# Altium PCB HLK-AX3000-KIT.PcbDoc (part 1 of 3)
Units mm, origin at the board's own origin, x right, y up, seen from the top; angles counter-clockwise.
Board outline 152 x 109 mm, 2 copper layers (Top Layer, Bottom Layer), stack 0.325 mm thick; 227 components, 273 nets, 847 pads, 829 vias.
Unrouted connection lines stored in the file: 195.
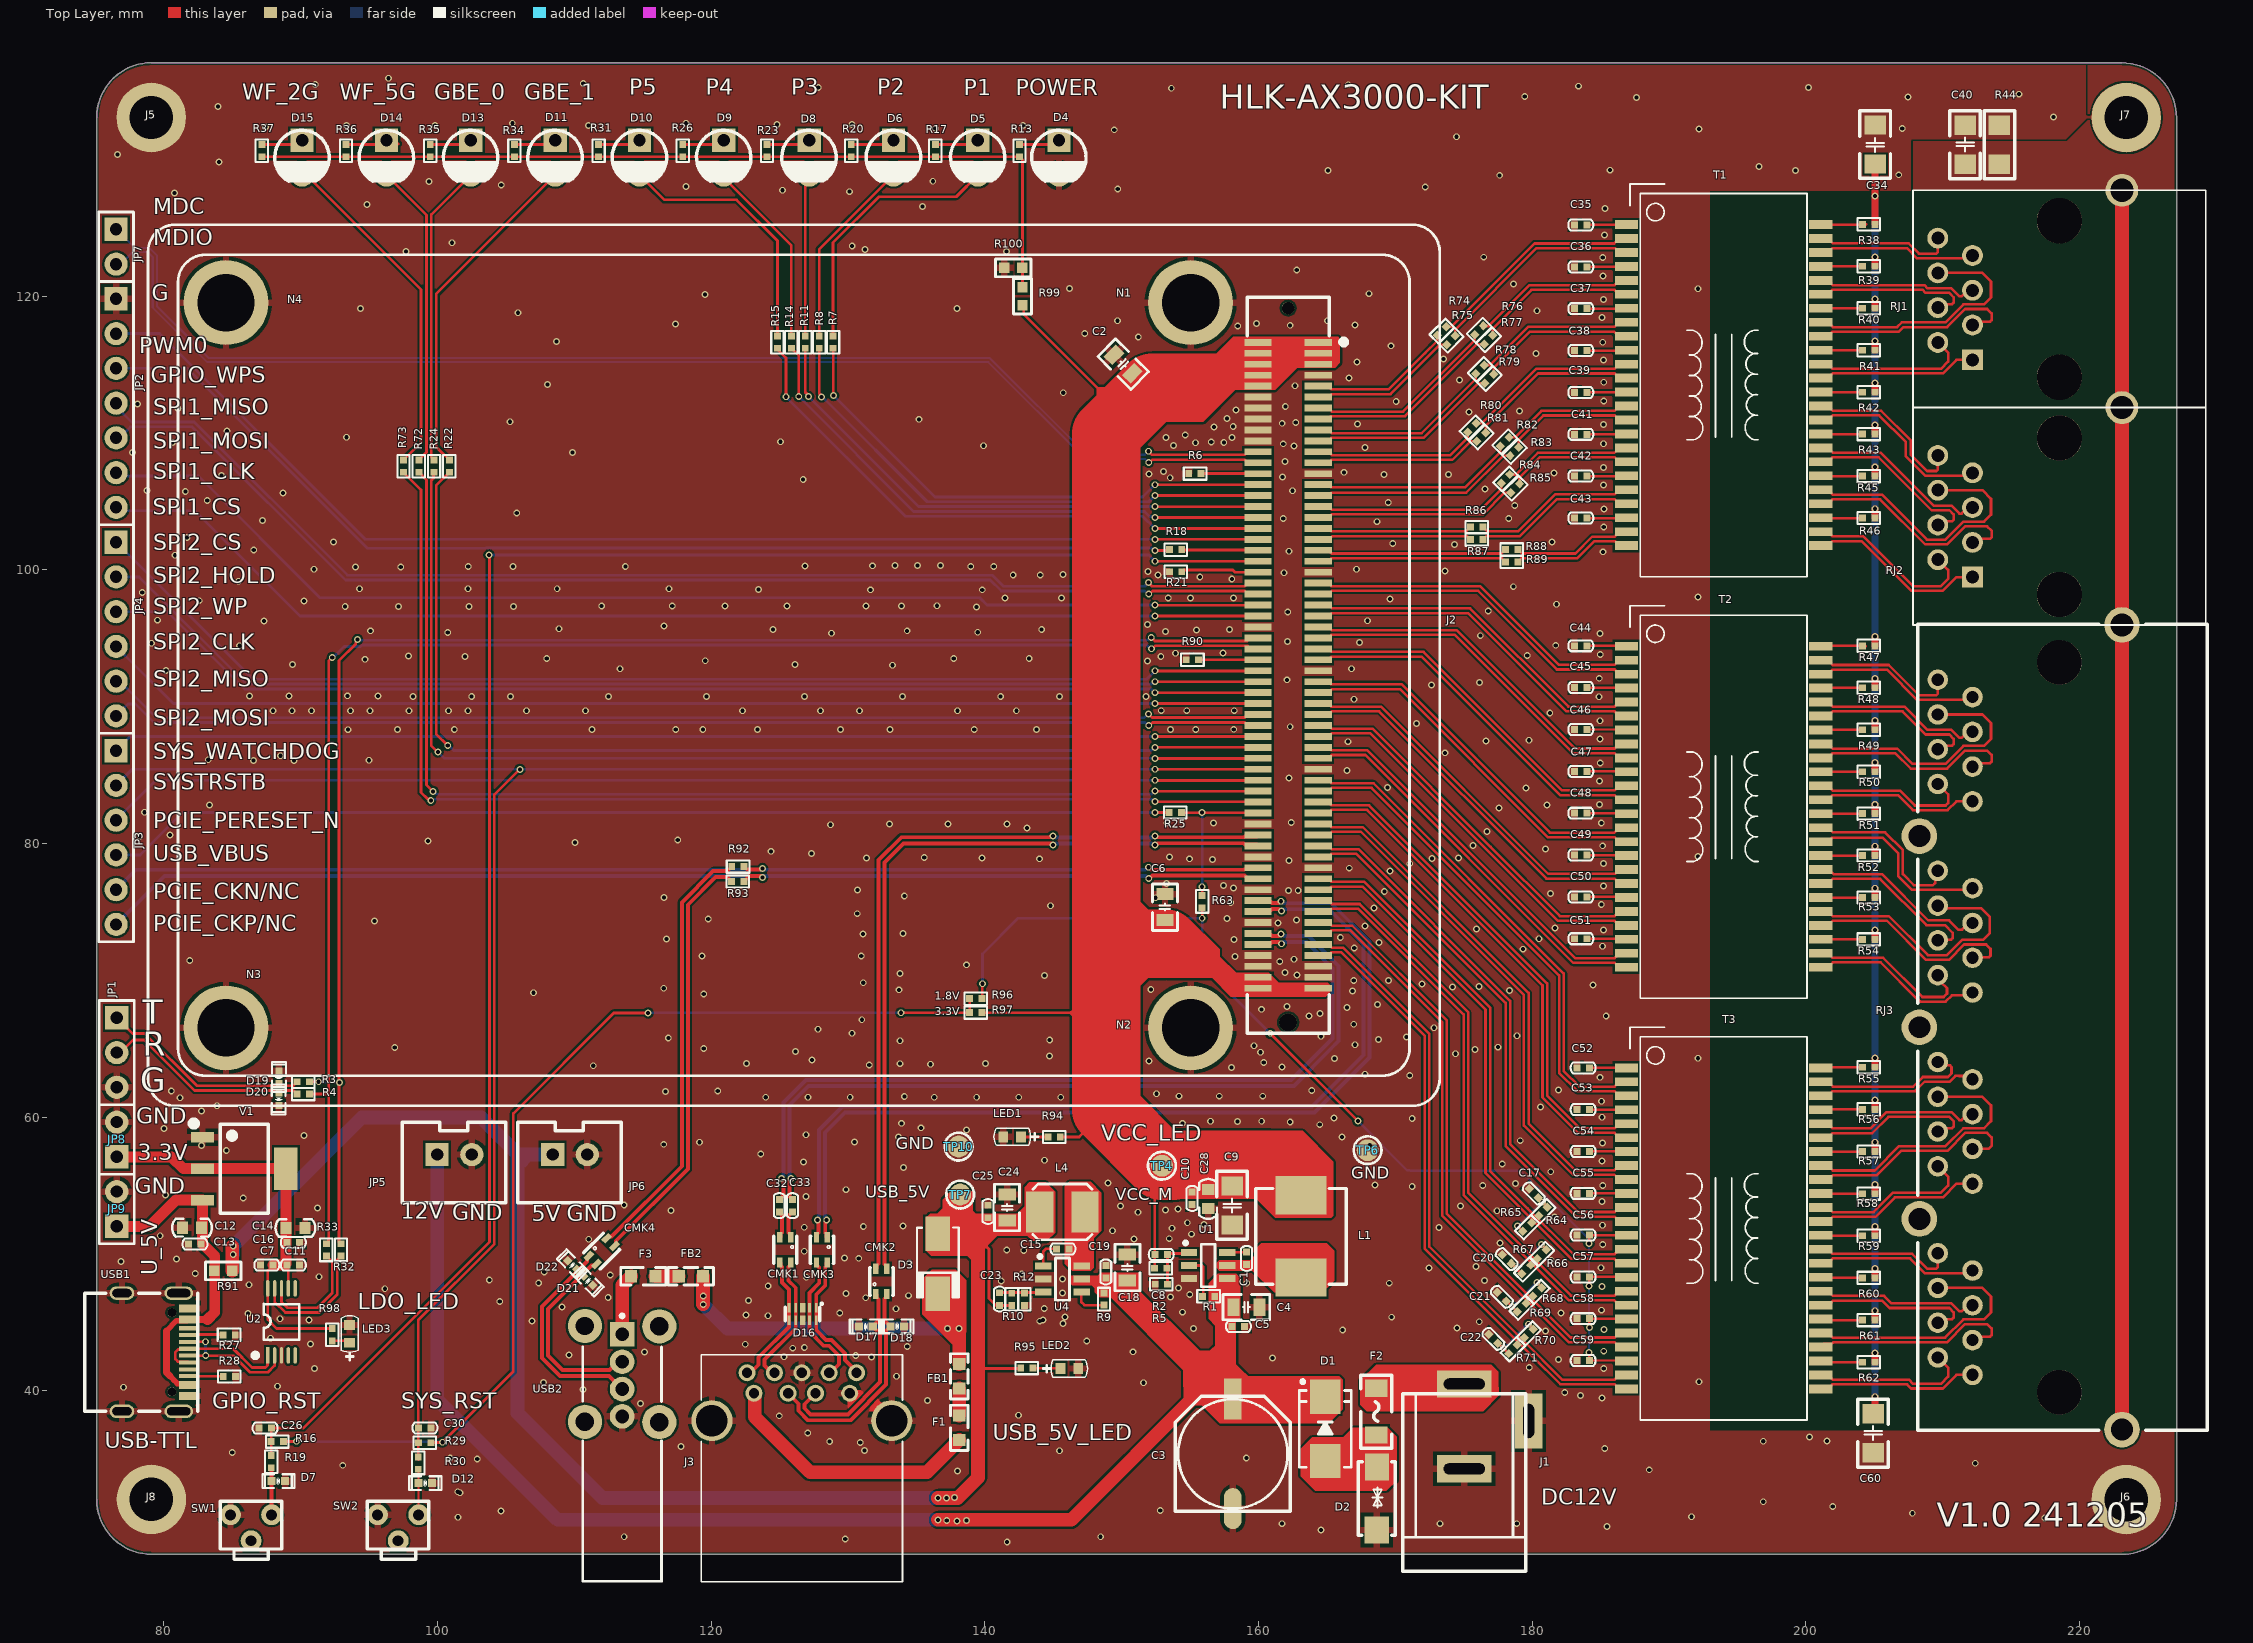
[diagram p0: Top Layer view]
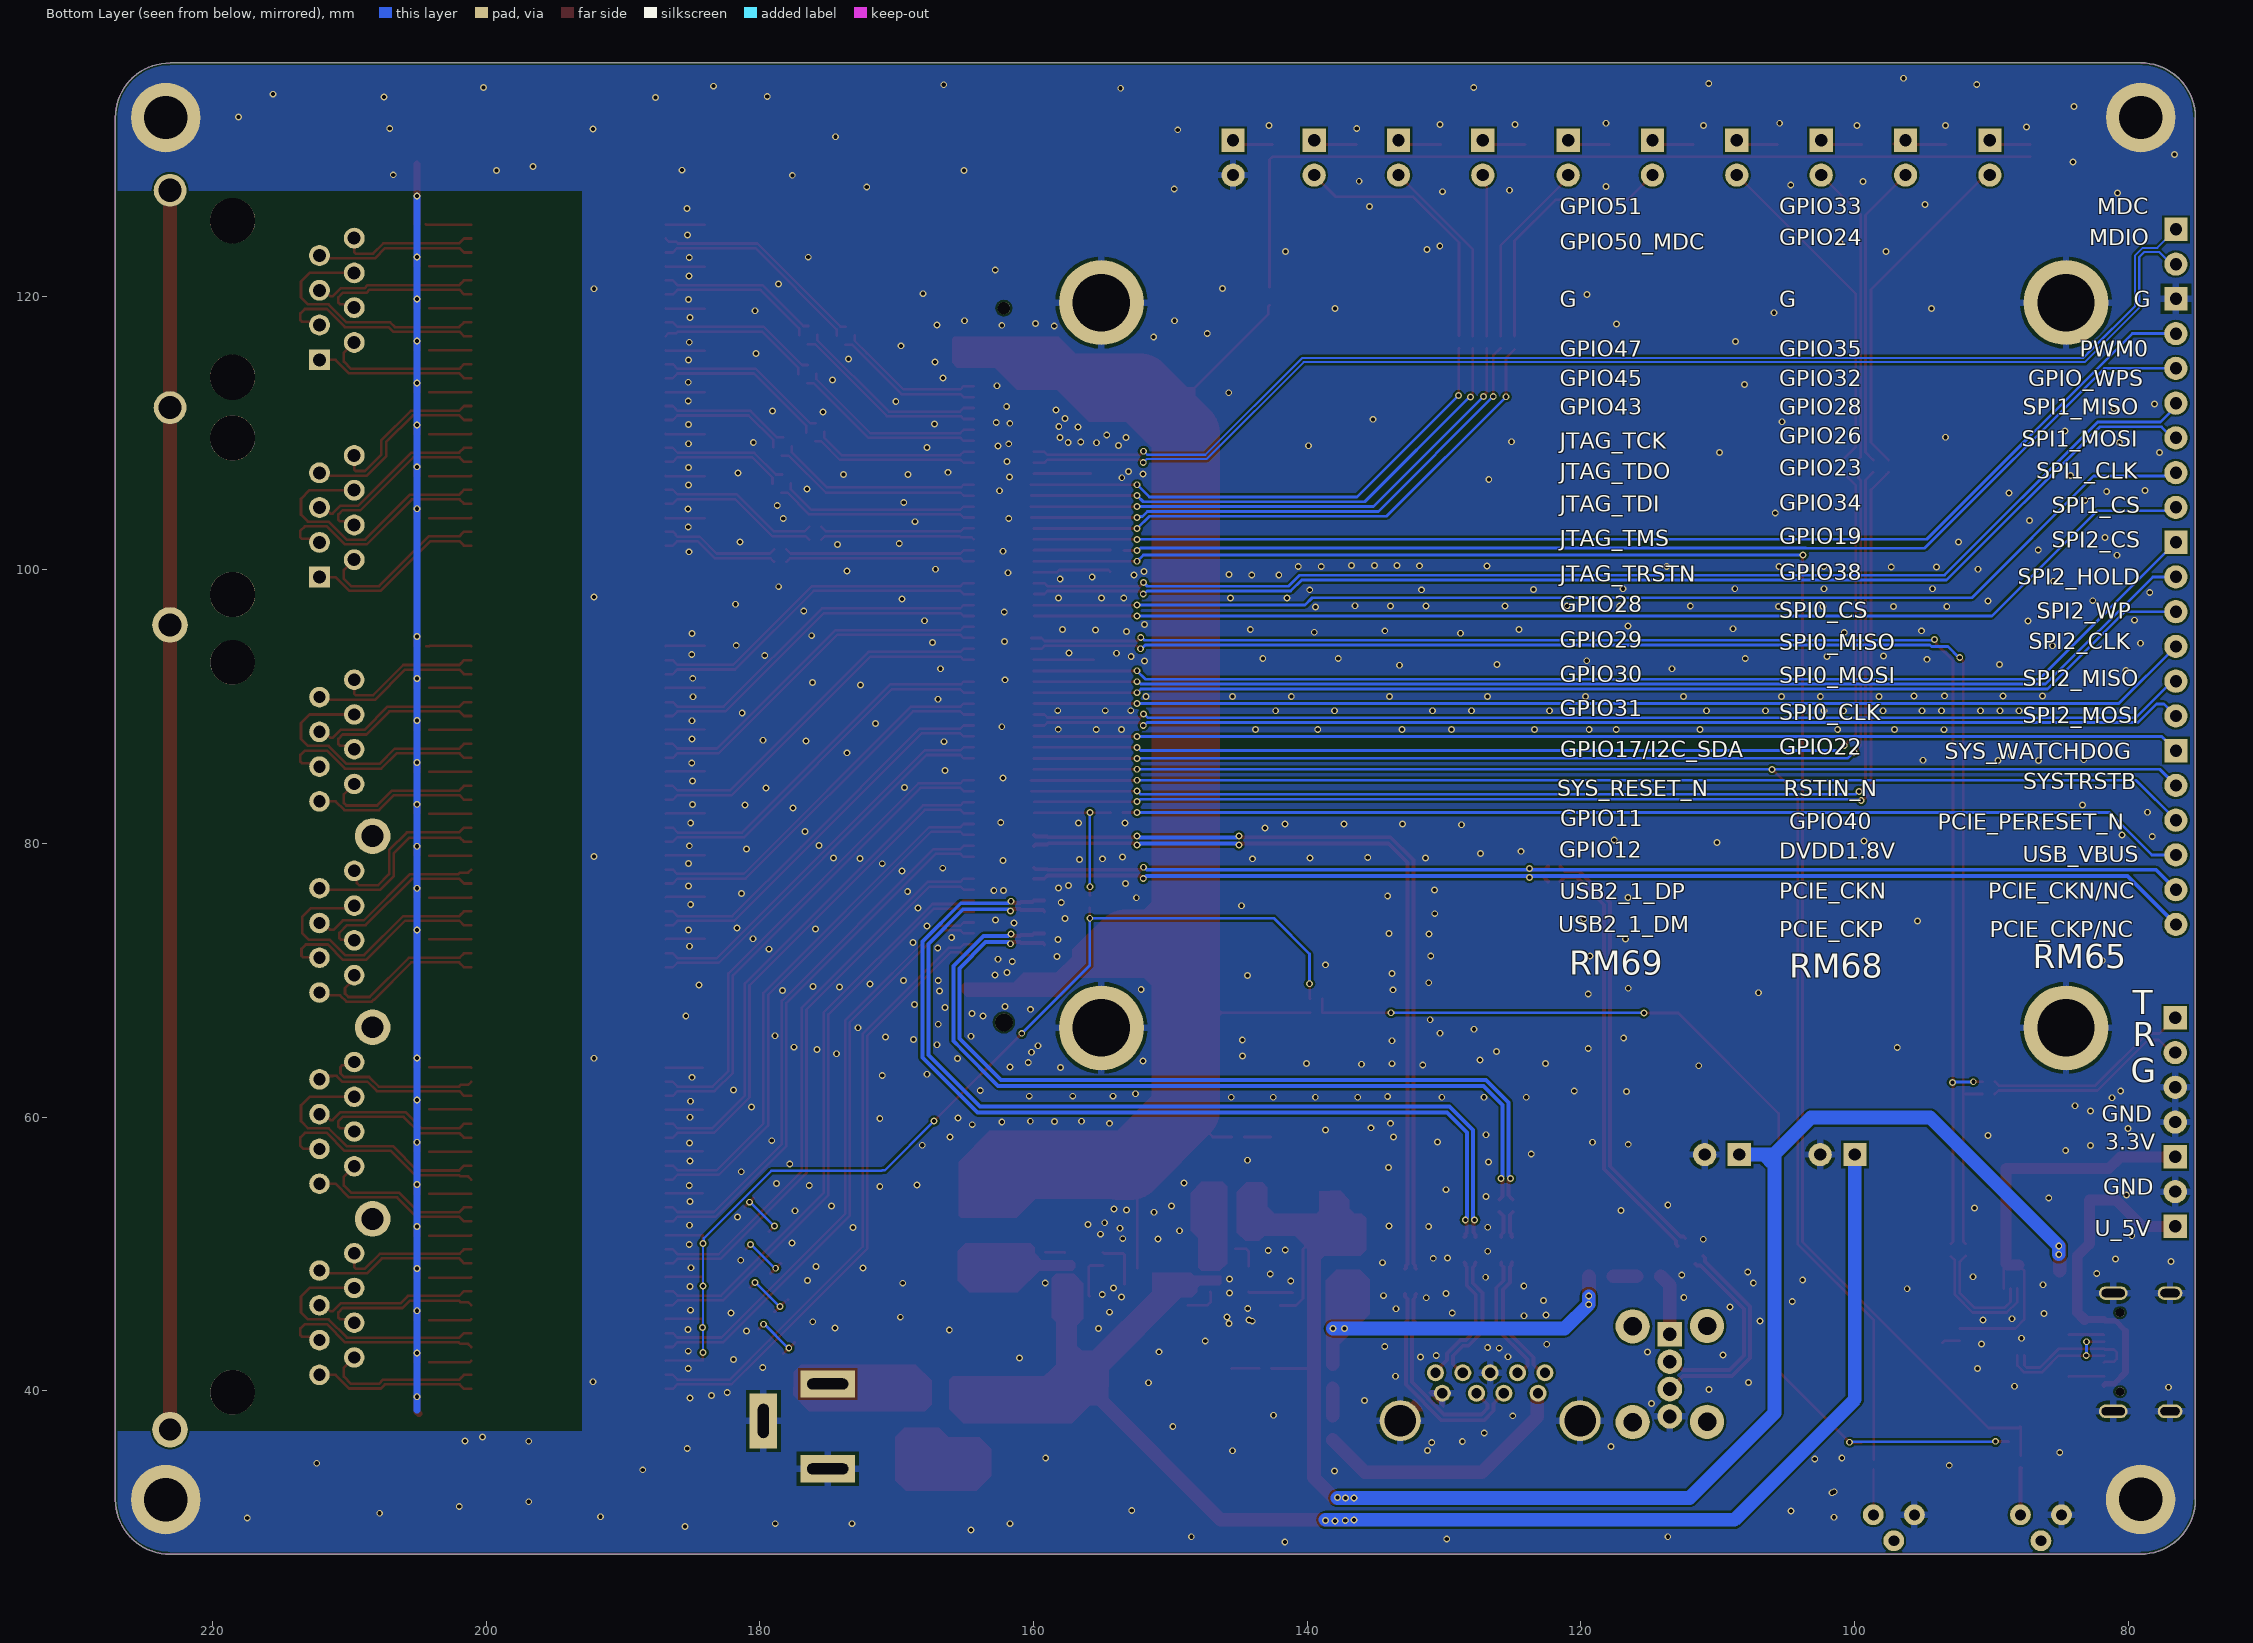
[diagram p1: Bottom Layer view, seen from below]

## Layer stack, top to bottom
Top Solder: solder mask 0.0102, Solder Resist, Dk 3.5
Top Layer: signal copper 0.0356
Dielectric1: core 0.254, FR-4, Dk 4.2
Bottom Layer: signal copper 0.0356
Bottom Solder: solder mask 0.0102, Solder Resist, Dk 3.5

## Board outline
75.089,32.059 75.089,133.053 cw(c79.089,133.053) 79.089,137.053 223.092,137.053 223.092,137.048 cw(c223.092,133.048) 227.092,133.048 227.093,133.047 227.093,32.053 cw(c223.093,32.053) 223.093,28.053 79.095,28.053 79.09,28.058 cw(c79.09,32.058)

## Design rules (kind name [scope] priority, off if disabled: settings)
Clearance Clearance_90ohm [InNetClass('90ohm')] p1: gap=0.152 ignorepadtopadclearanceinfootprint=FALSE
Clearance Clearance_100ohm [InNetClass('100ohm')] p2: gap=0.152 ignorepadtopadclearanceinfootprint=FALSE
Clearance [All] p3: gap=0.152 ignorepadtopadclearanceinfootprint=FALSE
DiffPairsRouting [All] p1: maxlimit=0.152 minlimit=0.152 mostfreqgap=0.152 toplayer_minwidth=0.283 toplayer_maxwidth=0.283 toplayer_prefwidth=0.283 bottomlayer_minwidth=0.283 bottomlayer_maxwidth=0.283 bottomlayer_prefwidth=0.283 maxuncoupledlength=12.7
FabricationTestPointUsage TestPointUsage [All] p1: valid=0 allowmultiple=FALSE
FabricationTestpoint Testpoint [All] p1: side=3 testpointundercomponent=TRUE minsize=1.016 maxsize=2.54 preferedsize=1.524 minholesize=0 maxholesize=1.016 preferedholesize=0.813 testpointgrid=0.025 allowsidetop=TRUE allowsidebottom=TRUE usegrid=TRUE gridtolerance=0
HoleSize [All] p1: absolutevalues=TRUE maxlimit=5 minlimit=0.2 maxpercent=80.000 minpercent=20.000
MatchedLengths DiffPair_USB2.0_5GMatchedLengths [InDifferentialPair ('USB_5G')] p1: tolerance=10 checknetsindiffpair=TRUE checkdiffpairvsdiffpair=FALSE checkxsignals=FALSE checkothers=FALSE
MatchedLengths DiffPair_USB2.0_7621MatchedLengths [InDifferentialPair ('USB')] p2: tolerance=10 checknetsindiffpair=TRUE checkdiffpairvsdiffpair=FALSE checkxsignals=FALSE checkothers=FALSE
MatchedLengths DiffPair_USB3.0TXMatchedLengths [InDifferentialPair ('SSUSB_TX')] p3: tolerance=0.7 checknetsindiffpair=TRUE checkdiffpairvsdiffpair=FALSE checkxsignals=FALSE checkothers=FALSE
MatchedLengths DiffPair_USB3.0RXMatchedLengths [InDifferentialPair ('SSUSB_RX')] p4: tolerance=0.7 checknetsindiffpair=TRUE checkdiffpairvsdiffpair=FALSE checkxsignals=FALSE checkothers=FALSE
MatchedLengths DiffPair_USB2.0_7621MatchedLengths_1 [InDifferentialPair ('USB')] p5: tolerance=5 checknetsindiffpair=TRUE checkdiffpairvsdiffpair=FALSE checkxsignals=FALSE checkothers=FALSE
MatchedLengths DiffPair_USB2.0_5GMatchedLengths_1 [InDifferentialPair ('USB_5G')] p6: tolerance=1 checknetsindiffpair=TRUE checkdiffpairvsdiffpair=FALSE checkxsignals=FALSE checkothers=FALSE
MatchedLengths DiffPair_USB3.0TXMatchedLengths_1 [InDifferentialPair ('SSUSB_TX')] p7: tolerance=0.7 checknetsindiffpair=TRUE checkdiffpairvsdiffpair=FALSE checkxsignals=FALSE checkothers=FALSE
MatchedLengths DiffPair_USB3.0RXMatchedLengths_1 [InDifferentialPair ('SSUSB_RX')] p8: tolerance=0.7 checknetsindiffpair=TRUE checkdiffpairvsdiffpair=FALSE checkxsignals=FALSE checkothers=FALSE
MatchedLengths DiffPair_PCIE_TXMatchedLengths [InDifferentialPair ('PCIE_TX')] p9: tolerance=0.7 checknetsindiffpair=TRUE checkdiffpairvsdiffpair=FALSE checkxsignals=FALSE checkothers=FALSE
MatchedLengths DiffPair_PCIE_CLKMatchedLengths [InDifferentialPair ('PCIE_CLK')] p10: tolerance=0.7 checknetsindiffpair=TRUE checkdiffpairvsdiffpair=FALSE checkxsignals=FALSE checkothers=FALSE
MatchedLengths DiffPair_PCIE_RXMatchedLengths [InDifferentialPair ('PCIE_RX')] p11: tolerance=0.7 checknetsindiffpair=TRUE checkdiffpairvsdiffpair=FALSE checkxsignals=FALSE checkothers=FALSE
MatchedLengths DiffPair_PCIE_RXMatchedLengths_1 [InDifferentialPair ('PCIE_RX')] p12: tolerance=25.4 checknetsindiffpair=TRUE checkdiffpairvsdiffpair=FALSE checkxsignals=FALSE checkothers=FALSE
MatchedLengths [InDifferentialPair ('PCIE_TX')] p13: tolerance=25.4 checknetsindiffpair=TRUE checkdiffpairvsdiffpair=FALSE checkxsignals=FALSE checkothers=FALSE
MatchedLengths DiffPair_PCIE_TXMatchedLengths_1 [InDifferentialPair ('PCIE_TX')] p14: tolerance=0.7 checknetsindiffpair=TRUE checkdiffpairvsdiffpair=FALSE checkxsignals=FALSE checkothers=FALSE
MatchedLengths DiffPair_1MatchedLengths [InDifferentialPair ('PCIE_TX')] p15: tolerance=0.7 checknetsindiffpair=TRUE checkdiffpairvsdiffpair=FALSE checkxsignals=FALSE checkothers=FALSE
PolygonConnect PolygonConnect_4 [All vs HasPad ('U5-76') Or HasPad ('U5-77')Or HasPad ('j4-1')Or HasPad ('j4-2')Or HasPad ('j4-3')Or HasPad ('j4-4')  Or HasPad ('U5-0')] p1: connectstyle=Relief reliefconductorwidth=0.5 reliefentries=4 polygonreliefangle="90 Angle" airgapwidth=0.254
PolygonConnect PolygonConnect_3 [All vs HasFootprint('M3 125X200')] p2: connectstyle=Direct reliefconductorwidth=0.254 reliefentries=4 polygonreliefangle="90 Angle" airgapwidth=0.254
PolygonConnect PolygonConnect_2 [InComponent('D16') or  InComponent('u5')or  InComponent('u1') or  InComponent('u2')  or  InComponent('u3') or  InComponent('u4')or  InComponent('tvs1')or InComponent('gc10')or  InComponent('GC21')or InComponent('gc45')or  InComponent('GC25')or InComponent('GC24')            or  InComponent('GC44')or InComponent('gc43')or  InComponent('GC23')or InComponent('gc22')    or InComponent('gc29') or InComponent('GU1')  or InComponent('GC46')or InComponent('GC47') or InComponent('GC48') or InComponent('GC16')or InComponent('GC15')   or InComponent('GR27') or InComponent('GR18') or InComponent('GR26')   or InComponent('GR32') or InComponent('GC27')  or InComponent('GC37')  or InComponent('GC38')             or InComponent('GC39')  or InComponent('GC41') or InComponent('GC12')or InComponent('GC30')or InComponent('GC31')or InComponent('GC36') or InComponent('GC40') or InComponent('GC18')  or InComponent('RJ1')] p3: connectstyle=Direct reliefconductorwidth=0.254 reliefentries=4 polygonreliefangle="90 Angle" airgapwidth=0.254
PolygonConnect [(HasFootprint('NANO-SIM_SMN-327') OR HasFootprint('HLK-RM65') OR HasFootprint('C 1206_L') OR HasFootprint('R 1206_L')OR HasFootprint('TEST 1.6')  )] p4: thpad.connectstyle=Relief thpad.reliefconductorwidth=0.5 thpad.reliefentries=4 thpad.polygonreliefangle="90 Angle" thpad.airgapwidth=0.254 smdpad.connectstyle=Direct smdpad.reliefconductorwidth=0.254 smdpad.reliefentries=4 smdpad.polygonreliefangle="90 Angle" smdpad.airgapwidth=0.254 via.connectstyle=Direct via.reliefconductorwidth=0.254 via.reliefentries=4 via.polygonreliefangle="90 Angle" via.airgapwidth=0.254
PolygonConnect PolygonConnect_1 [All] p5: thpad.connectstyle=Relief thpad.reliefconductorwidth=0.5 thpad.reliefentries=4 thpad.polygonreliefangle="90 Angle" thpad.airgapwidth=0.254 smdpad.connectstyle=Relief smdpad.reliefconductorwidth=0.5 smdpad.reliefentries=4 smdpad.polygonreliefangle="90 Angle" smdpad.airgapwidth=0.254 via.connectstyle=Direct via.reliefconductorwidth=0.254 via.reliefentries=4 via.polygonreliefangle="90 Angle" via.airgapwidth=0.254
RoutingVias [All] p1: holewidth=0.4 width=0.4 viastyle="Through Hole" minholewidth=0.2 minwidth=0.4 maxholewidth=0.6 maxwidth=0.8
SilkToSilkClearance [All] p1: silktosilkclearance=0
SolderMaskExpansion [All] p1: expansion=0.102 istentingtop=FALSE
Width Width_90ohm [InNetClass('90ohm')] p1: maxlimit=0.283 minlimit=0.283 preferedwidth=0.283 minimp=50.000000 maximp=50.000000 favimp=50.000000
Width Width_100ohm [InNetClass('100ohm')] p2: maxlimit=0.188 minlimit=0.188 preferedwidth=0.188
Width [All] p3: maxlimit=5 minlimit=0.152 preferedwidth=0.152
25 further rules are at their usual default settings.

## Classes and differential pairs
component class HLK-AX3000-KIT-POWER_LED: C1 C2 C3 C4 C5 C6 C8 C9 C10 C15 C18 C19 C23 C24 C25 C26 C28 C30 C32 C33 CMK1 CMK2 CMK3 CMK4 D1 D2 D3 D4 D5 D6 D7 D8 D9 D10 D11 D12 D13 D14 D15 D16 D17 D18 D19 D20 D21 D22 F1 F2 F3 FB1 FB2 J1 J2 J3 J5 J6 J7 J8 JP1 JP2 JP3 JP4 JP5 JP6 JP7 L1 L4 LED1 LED2 m R1 R2 R3 R4 R5 R6 R7 R8 R9 R10 R11 R12 R13 R14 R15 R16 R17 R18 R19 R20 R21 R22 R23 R24 R25 R26 R29 R30 R31 R34 R35 R36 R37 R72 R73 R74 R75 R76 R77 R78 R79 R80 R81 R82 R83 R84 R85 R86 R87 R88 R89 R90 R92 R93 R94 R95 R96 R97 R99 R100 SW1 SW2 TP4 TP6 TP7 TP10 U1 U4 USB2
component class HLK-AX3000-KIT-RJ45: C7 C11 C12 C13 C14 C16 C17 C20 C21 C22 C34 C35 C36 C37 C38 C39 C40 C41 C42 C43 C44 C45 C46 C47 C48 C49 C50 C51 C52 C53 C54 C55 C56 C57 C58 C59 C60 JP8 JP9 LED3 R27 R28 R32 R33 R38 R39 R40 R41 R42 R43 R44 R45 R46 R47 R48 R49 R50 R51 R52 R53 R54 R55 R56 R57 R58 R59 R60 R61 R62 R63 R64 R65 R66 R67 R68 R69 R70 R71 R91 R98 RJ1 RJ2 RJ3 T1 T2 T3 U2 USB1 V1

## Components (designator, comment, footprint, x,y, rotation, side; value= is the part's Value field where it differs from the comment)
C1 "100nF" "C 0402_L" 159.131,49.677 r270 top
C2 "22uF" "C 0805_L" 150.109,115.034 r315 top value=100pF
C3 "220uF" "CT 8*12 - C" 158.122,35.394 r90 top
C4 "10uF" "C 0805_L" 159.112,46.114 r180 top value=100pF
C5 "100nF" "C 0402_L" 158.528,44.71 r0 top
C6 "22uF" "C 0805_L" 153.16,75.345 r270 top value=100pF
C7 "100nF" "C 0402_L" 87.525,49.186 r0 top
C8 "100pF" "C 0402_L" 152.889,49.968 r180 top
C9 "47uF" "C 1206_L" 158.071,53.529 r90 top
C10 "100nF" "C 0402_L" 155.15,54.063 r270 top
C11 "100nF" "C 0402_L" 89.462,49.19 r180 top
C12 "10uF" "C 0603_L" 82.056,51.918 r0 top value=100pF
C13 "100nF" "C 0402_L" 82.271,50.724 r180 top
C14 "10uF" "C 0603_L" 89.609,51.896 r180 top value=100pF
C15 "100nF" "C 0402_L" 145.701,50.374 r0 top
C16 "100nF" "C 0402_L" 89.459,50.851 r0 top
C17 "100nF" "C 0402_L" 180.11,54.43 r135 top
C18 "10uF" "C 0805_L" 150.414,49.005 r270 top value=100pF
C19 "100nF" "C 0402_L" 148.837,48.688 r90 top
C20 "100nF" "C 0402_L" 178.131,49.624 r135 top
C21 "100nF" "C 0402_L" 177.779,46.875 r135 top
C22 "100nF" "C 0402_L" 177.155,43.8 r135 top
C23 "47pF" "C 0402_L" 141.074,46.707 r270 top value=100pF
C24 "22uF" "C 0805_L" 141.625,53.392 r270 top value=100pF
C25 "100nF" "C 0402_L" 140.23,53.105 r90 top
C26 "100nF" "C 0402_L" 87.396,37.274 r0 top
C28 "10uF" "C 0603_L" 156.318,54.023 r270 top
C30 "100nF" "C 0402_L" 99.076,37.292 r180 top
C32 "0.1uF" "C 0402_L" 124.975,53.529 r90 top
C33 "0.1uF" "C 0402_L" 125.933,53.529 r90 top
C34 "1000pF,2KV,SMD,1206" "C 1206_L" 205.066,131.058 r90 top
C35 "0.1uF" "C 0402_L" 183.552,125.201 r0 top
C36 "0.1uF" "C 0402_L" 183.552,122.142 r0 top
C37 "0.1uF" "C 0402_L" 183.552,119.082 r0 top
C38 "0.1uF" "C 0402_L" 183.552,116.022 r0 top
C39 "0.1uF" "C 0402_L" 183.552,112.962 r0 top
C40 "1000pF/2KV" "C 1206_L" 211.634,131.092 r270 top
C41 "0.1uF" "C 0402_L" 183.552,109.902 r0 top
C42 "0.1uF" "C 0402_L" 183.552,106.842 r0 top
C43 "0.1uF" "C 0402_L" 183.552,103.783 r0 top
C44 "0.1uF" "C 0402_L" 183.552,94.445 r0 top
C45 "0.1uF" "C 0402_L" 183.552,91.387 r0 top
C46 "0.1uF" "C 0402_L" 183.552,88.328 r0 top
C47 "0.1uF" "C 0402_L" 183.552,85.27 r0 top
C48 "0.1uF" "C 0402_L" 183.552,82.212 r0 top
C49 "0.1uF" "C 0402_L" 183.552,79.154 r0 top
C50 "0.1uF" "C 0402_L" 183.552,76.095 r0 top
C51 "0.1uF" "C 0402_L" 183.552,73.037 r0 top
C52 "0.1uF" "C 0402_L" 183.721,63.6 r0 top
C53 "0.1uF" "C 0402_L" 183.721,60.545 r0 top
C54 "0.1uF" "C 0402_L" 183.721,57.49 r0 top
C55 "0.1uF" "C 0402_L" 183.721,54.435 r0 top
C56 "0.1uF" "C 0402_L" 183.721,51.38 r0 top
C57 "0.1uF" "C 0402_L" 183.721,48.325 r0 top
C58 "0.1uF" "C 0402_L" 183.721,45.269 r0 top
C59 "0.1uF" "C 0402_L" 183.721,42.214 r0 top
C60 "1000pF,2KV,SMD,1206" "C 1206_L" 204.913,36.925 r270 top
CMK1 "ACM2012E-2P" SMD_4P 125.416,50.303 r270 top
CMK2 "ACM2012E-2P" SMD_4P 132.437,47.992 r90 top
CMK3 "ACM2012E-2P" SMD_4P 128.094,50.303 r270 top
CMK4 "ACM2012E-2P" SMD_4P_2.1X2.1 111.991,50.212 r45 top
D1 "SS54" SMB 164.878,37.222 r90 top
D2 "SMAJ26CA" DO-214AC 168.641,29.827 r90 top
D3 "SS12" SMA 136.557,49.287 r270 top
D4 "RED" "LED 3MM-R" 145.414,130.117 r270 top
D5 "YELLOW" "LED 3MM-Y" 139.487,130.117 r270 top
D6 "YELLOW" "LED 3MM-Y" 133.323,130.117 r270 top
D7 "BPESD0402-05ST" esd0402#1 88.362,33.4 r180 top
D8 "YELLOW" "LED 3MM-Y" 127.158,130.117 r270 top
D9 "YELLOW" "LED 3MM-Y" 120.925,130.117 r270 top
D10 "YELLOW" "LED 3MM-Y" 114.761,130.117 r270 top
D11 "YELLOW" "LED 3MM-Y" 108.596,130.117 r270 top
D12 "BPESD0402-05ST" esd0402#1 99.102,33.253 r180 top
D13 "YELLOW" "LED 3MM-Y" 102.432,130.117 r270 top
D14 "G" "LED 3MM-G" 96.267,130.117 r270 top
D15 "G" "LED 3MM-G" 90.102,130.117 r270 top
D16 "B0524P" DFN-10 126.678,45.613 r180 top
D17 "BPESD0402-05ST" ESD0402#1 131.301,44.695 r0 top
D18 "BPESD0402-05ST" ESD0402#1 133.594,44.709 r180 top
D19 "BPESD0402-05ST" esd0402#2 87.398,62.935 r270 top
D20 "BPESD0402-05ST" esd0402#2 89.402,61.295 r90 top
D21 "BPESD0402-05ST" ESD0402#2 111.732,48.735 r135 top
D22 "BPESD0402-05ST" ESD0402#2 109.135,48.489 r315 top
F1 "1A" "FU 0603" 138.131,37.295 r90 top
F2 "2A" "FU 1206" 168.607,38.485 r270 top
F3 "1A" "FU 0603" 115.034,48.368 r0 top
FB1 "CBM160808U101T" "L 0603" 138.131,41.058 r270 top
FB2 "CBM160808U101T" "L 0603" 118.514,48.368 r180 top
J1 "DC-044B" DC-005 175.038,34.299 r270 top
J2 "BTB 0.8 120P" HLK-RM65 160.387,86.415 r90 top locked
J3 "USB3.0" USB3.0-9P-DIP 126.623,39.57 r0 top
J5 "M3" "M3 125X200" 79.077,133.055 r90 top
J6 "M3" "M3 125X200" 223.413,32.053 r90 top
J7 "M3" "M3 125X200" 223.413,133.053 r90 top
J8 "M3" "M3 125X200" 79.09,32.058 r90 top
JP1 "HDR-1X3" HDR2.54-LI-3P 76.556,64.719 r270 top
JP2 "HDR-1X7" HDR2.54-LI-7P 76.508,112.181 r270 top
JP3 "HDR-1X6" HDR2.54-LI-6P 76.508,80.431 r270 top
JP4 "HDR-1X6" HDR2.54-LI-6P 76.508,95.671 r270 top
JP5 "HDR-1X2" XH2.54-LI-2P 101.239,57.265 r0 top
JP6 "HDR-1X2" XH2.54-LI-2P 109.68,57.265 r0 top
JP7 "HDR-1X2" HDR2.54-LI-2P 76.508,123.611 r270 top
JP8 "HDR-1X2" HDR2.54-LI-2P 76.556,58.369 r90 top
JP9 "HDR-1X2" HDR2.54-LI-2P 76.556,53.289 r90 top
L1 "4.7uH" "L 6*6" 163.103,51.285 r90 top
L4 "4.7uH" "L 4*4" 145.665,53.078 r180 top
LED1 "LED-SMD" "LED 0603G-L" 141.988,58.556 r180 top
LED2 "LED-SMD" "LED 0603G-L" 146.177,41.631 r0 top
LED3 "LED-SMD" "LED 0603G-L" 93.571,44.16 r90 top
R1 "47K" "R 0402_L" 156.373,46.906 r180 top
R2 "100K/1%" "R 0402_L" 152.838,48.952 r0 top
R3 "100R" "R 0402_L" 90.17,62.586 r0 top
R4 "100R" "R 0402_L" 90.17,61.686 r0 top
R5 "22.1K/1%" "R 0402_L" 152.921,47.79 r180 top
R6 "0R" "R 0402_L" 155.334,107.032 r0 top
R7 "0R" "R 0402_L" 128.905,116.662 r270 top
R8 "0R" "R 0402_L" 127.888,116.662 r270 top
R9 "47K" "R 0402_L" 148.707,46.729 r270 top
R10 "73.2K/1%" "R 0402_L" 141.967,46.66 r90 top
R11 "0R" "R 0402_L" 126.871,116.662 r270 top
R12 "10K/1%" "R 0402_L" 142.891,46.71 r270 top
R13 "1K" "R 0402_L" 142.533,130.655 r270 top
R14 "0R" "R 0402_L" 125.854,116.662 r270 top
R15 "0R" "R 0402_L" 124.837,116.662 r270 top
R16 "10K" "R 0402_l" 88.301,36.289 r180 top
R17 "1K" "R 0402_L" 136.38,130.655 r270 top
R18 "0R" "R 0402_L" 153.924,101.473 r0 top
R19 "22R" "R 0402_l" 87.854,34.802 r90 top
R20 "1K" "R 0402_L" 130.227,130.655 r270 top
R21 "0R" "R 0402_L" 153.924,99.851 r0 top
R22 "0R" "R 0402_L" 100.863,107.597 r270 top
R23 "1K" "R 0402_L" 124.074,130.655 r270 top
R24 "0R" "R 0402_L" 99.747,107.597 r270 top
R25 "0R" "R 0402_L" 153.898,82.267 r0 top
R26 "1K" "R 0402_L" 117.921,130.655 r270 top
R27 "5.1K" "R 0402_L" 84.785,44.094 r180 top
R28 "5.1K" "R 0402_L" 84.811,41.046 r180 top
R29 "10K" "R 0402_l" 99.082,36.204 r180 top
R30 "22R" "R 0402_l" 98.593,34.701 r90 top
R31 "1K" "R 0402_L" 111.768,130.655 r270 top
R32 "0R" "R 0402_L" 92.942,50.318 r270 top
R33 "0R" "R 0402_L" 91.871,50.318 r270 top
R34 "1K" "R 0402_L" 105.614,130.655 r270 top
R35 "1K" "R 0402_L" 99.461,130.655 r270 top
R36 "1K" "R 0402_L" 93.308,130.655 r270 top
R37 "1K" "R 0402_L" 87.155,130.655 r270 top
R38 "75R" "R 0402_L" 204.613,125.251 r180 top
R39 "75R" "R 0402_L" 204.613,122.184 r180 top
R40 "75R" "R 0402_L" 204.613,119.117 r180 top
R41 "75R" "R 0402_L" 204.613,116.05 r180 top
R42 "75R" "R 0402_L" 204.613,112.983 r180 top
R43 "75R" "R 0402_L" 204.613,109.916 r180 top
R44 "0R" "R 1206_L" 214.143,131.092 r270 top
R45 "75R" "R 0402_L" 204.613,106.849 r180 top
R46 "75R" "R 0402_L" 204.613,103.783 r180 top
R47 "75R" "R 0402_L" 204.613,94.445 r180 top
R48 "75R" "R 0402_L" 204.613,91.38 r180 top
R49 "75R" "R 0402_L" 204.613,88.314 r180 top
R50 "75R" "R 0402_L" 204.613,85.249 r180 top
R51 "75R" "R 0402_L" 204.613,82.183 r180 top
R52 "75R" "R 0402_L" 204.613,79.118 r180 top
R53 "75R" "R 0402_L" 204.613,76.052 r180 top
R54 "75R" "R 0402_L" 204.613,72.987 r180 top
R55 "75R" "R 0402_L" 204.613,63.65 r180 top
R56 "75R" "R 0402_L" 204.613,60.57 r180 top
R57 "75R" "R 0402_L" 204.613,57.49 r180 top
R58 "75R" "R 0402_L" 204.613,54.41 r180 top
R59 "75R" "R 0402_L" 204.613,51.33 r180 top
R60 "75R" "R 0402_L" 204.613,48.25 r180 top
R61 "75R" "R 0402_L" 204.613,45.17 r180 top
R62 "75R" "R 0402_L" 204.613,42.09 r180 top
R63 "0R" "R 0402_L" 155.878,75.736 r90 top
R64 "49.9R" "R 0402_L" 180.784,53.096 r45 top
R65 "49.9R" "R 0402_L" 179.629,51.95 r45 top
R66 "49.9R" "R 0402_L" 180.68,49.967 r45 top
R67 "49.9R" "R 0402_L" 179.549,48.859 r45 top
R68 "49.9R" "R 0402_L" 180.359,47.205 r45 top
R69 "49.9R" "R 0402_L" 179.222,46.076 r45 top
R70 "49.9R" "R 0402_L" 179.737,44.167 r45 top
R71 "49.9R" "R 0402_L" 178.587,43.028 r45 top
R72 "0R" "R 0402_L" 98.63,107.597 r270 top
R73 "0R" "R 0402_L" 97.514,107.597 r270 top
R74 "0R" "R 0402_L" 173.379,117.441 r45 top
R75 "0R" "R 0402_L" 174.062,116.758 r45 top
R76 "0R" "R 0402_L" 176.11,117.489 r45 top
R77 "0R" "R 0402_L" 176.796,116.792 r45 top
R78 "0R" "R 0402_L" 176.179,114.631 r45 top
R79 "0R" "R 0402_L" 176.847,113.95 r45 top
R80 "0R" "R 0402_L" 175.588,110.37 r45 top
R81 "0R" "R 0402_L" 176.265,109.686 r45 top
R82 "0R" "R 0402_L" 177.975,109.343 r45 top
R83 "0R" "R 0402_L" 178.685,108.63 r45 top
R84 "0R" "R 0402_L" 178.036,106.63 r45 top
R85 "0R" "R 0402_L" 178.743,105.94 r45 top
R86 "0R" "R 0402_L" 175.924,103.128 r0 top
R87 "0R" "R 0402_L" 175.924,102.206 r0 top
R88 "0R" "R 0402_L" 178.486,101.491 r0 top
R89 "0R" "R 0402_L" 178.486,100.573 r0 top
R90 "0R" "R 0402_L" 155.143,93.421 r0 top
R91 "0R" "R 0603_L" 84.338,48.768 r0 top
R92 "0R" "R 0402_L" 121.935,78.309 r0 top
R93 "0R" "R 0402_L" 121.925,77.22 r0 top
R94 "4.7K" "R 0402_L" 145.034,58.547 r0 top
R95 "10K" "R 0402_L" 143.09,41.66 r180 top
R96 "1K" "R 0402_L" 139.319,68.656 r0 top
R97 "1K" "R 0402_L" 139.319,67.64 r0 top
R98 "4.7K" "R 0402_L" 92.308,44.082 r90 top
R99 "0R" R0603 142.748,119.99 r90 top
R100 "10K/NC" R0603 142.077,122.072 r180 top
RJ1 "RJ45X1" RJ45_网口不带灯X1 216.37,119.792 r90 top
RJ2 "RJ45X1" RJ45_网口不带灯X1 216.37,103.912 r90 top
RJ3 "RJ45_不带灯X4" RJ45_网口不带灯X4 215.695,66.567 r90 top
SW1 "6x6x5" "TSW DIP-4.5*4.5*3_V" 86.375,29.99 r0 top
SW2 "6x6x5" "TSW DIP-4.5*4.5*3_V" 97.123,29.99 r0 top
T1 "HN4824CG" TRANSFORMER/48P/SMD/GS5014LF 193.987,113.499 r270 top locked
T2 "HN4824CG" TRANSFORMER/48P/SMD/GS5014LF 193.987,82.684 r270 top
T3 "HN4824CG" TRANSFORMER/48P/SMD/GS5014LF 193.987,51.869 r270 top
TP4 "测试点" "TEST 1.6" 152.94,56.45 r270 top
TP6 "测试点" "TEST 1.6" 167.97,57.582 r270 top
TP7 "测试点" "TEST 1.6" 138.198,54.341 r0 top
TP10 "测试点" "TEST 1.6" 138.081,57.847 r0 top
U1 "SY8156IADC" SOT23-6N 156.318,49.155 r270 top
U2 "CH340E" MSOP10_L 88.595,45.034 r0 top
U4 "SY8120IABC" SOT23-6N 145.673,48.163 r270 top
USB1 "USB_TYPE_C_16Pin" USB-C-16PIN-1 81.026,47.174 r270 top
USB2 "USB" USB-A/S_E 113.49,25.568 r270 top
V1 "AMS1117-3V3" SOT223_L 85.867,56.232 r270 top

## Footprints (in the part's own frame and the unit in brackets; to place one, negate y for a bottom-side part, rotate by r counter-clockwise, add the part's x,y. Pads: shape width x height; smd on the part's side, far side on the other; paste and mask are expansions set on the pad)
"C 0402_L" [mil]
  rect 20x20 smd: 1(-18,0) 2(18,0)
  silkscreen extent -36,-16 36,16, body extent -21,-10 18,10, height 21
"C 0603_L" [mm]
  rect 0.8x0.9 smd: 1(-0.7,0) 2(0.7,0)
  silkscreen extent -1.46,-0.64 1.45,0.65, body extent -0.83,-0.39 0.8,0.43, height 0.81
"C 0805_L" [mil] "无极性贴片电容"
  rect 35x50 smd: 1(-37.4,0) 2(37.4,0)
  silkscreen extent -67,-36 67,36, body extent -39,-24 39,24, height 20
"C 1206_L" [mil] "无极性贴片电容"
  rect 55x62 smd: 1(-55.12,0) 2(57.09,0)
  silkscreen extent -96,-44 98,44, body extent -63,-32 63,32, height 48
"CT 8*12 - C" [mm] "直径8mm，高12mm"
  rect 3x1.3 smd: 1(4,0)
  oval 3x1.3 smd: 2(-4,0)
  silkscreen extent -4.2,-4.2 4.2,4.2, body extent -4.5,-4.15 4.5,4.15, height 12
DC-005 [mm] "5.5*2.1mm，DC30V,2.5A"
  rect 2x4 hole 0.8 slot 3 at 90 deg: 1(-6.2,0) 2(0,0)
  rect 4x2 hole 0.8 slot 2.5 at 0 deg: 3(-3.5,4.7)
  silkscreen extent -5.48,-4.5 7.5,4.5, body extent -6.55,-4.5 7.5,4.8, height 11.2
DFN-10 [mm] "DFN-10_B0524P"
  rect 0.2x0.7 smd: 1(-1,-0.45) 2(-0.5,-0.45) 4(0.5,-0.45) 5(1,-0.45) 6(1,0.45) 7(0.5,0.45) 9(-0.5,0.45) 10(-1,0.45)
  rect 0.4x0.7 smd: 3(0,-0.45) 8(0,0.45)
  silkscreen extent -1.44,-0.79 1.25,0.51
DO-214AC [mm]
  rect 2x1.8 smd: 1(0,0)
  rect 2x1.75 smd: 2(4.6,0)
  silkscreen extent -0.4,-1.35 5,1.35, body extent -0.2,-1.34 4.91,1.33, height 2.12
esd0402#1 [mm]
  rect 0.6x0.6 smd paste-100 mask+0.051: 1(-0.5,0) 2(0.5,0)
  silkscreen extent -1.18,-0.5 1.17,0.51
esd0402#2 [mm]
  rect 0.508x0.508 smd: 1(-0.449,1) 2(0.466,1)
  silkscreen extent -1.1,0.51 1.09,1.52
ESD0402#1 [mm]
  rect 0.6x0.6 smd paste-100 mask+0.051: 1(-0.5,0) 2(0.5,0)
  silkscreen extent -1.18,-0.5 1.17,0.51
ESD0402#2 [mm]
  rect 0.508x0.508 smd: 1(-0.449,1) 2(0.466,1)
  silkscreen extent -1.1,0.51 1.09,1.52
"FU 0603" [mil] "贴片保险丝"
  rect 35x35 smd: 1(-35,0) 2(35,0)
  silkscreen extent -65,-25 65,25, body extent -31,-16 31,16, height 20
"FU 1206" [mil] "贴片保险丝"
  rect 50x65 smd: 1(-67.5,0) 2(67.5,0)
  silkscreen extent -105,-45 105,45, body extent -63,-32 63,32, height 34
HDR2.54-LI-2P [mm] "排针，2脚"
  rect 1.7x1.7 hole 0.9: 1(-1.27,0)
  round 1.7 hole 0.9: 2(1.27,0)
  silkscreen extent -2.54,-1.27 2.54,1.27, body extent -2.54,-1.27 2.54,1.27, height 8.5
HDR2.54-LI-3P [mm] "排针，3脚"
  rect 1.7x1.7 hole 0.9: 1(-2.54,0)
  round 1.7 hole 0.9: 2(0,0) 3(2.54,0)
  silkscreen extent -3.81,-1.27 3.81,1.27, body extent -3.81,-1.27 3.81,1.27, height 8.5
HDR2.54-LI-6P [mm] "排针，6脚"
  rect 1.7x1.7 hole 0.9: 1(-6.35,0)
  round 1.7 hole 0.9: 2(-3.81,0) 3(-1.27,0) 4(1.27,0) 5(3.81,0) 6(6.35,0)
  silkscreen extent -7.62,-1.27 7.62,1.27, body extent -7.62,-1.27 7.62,1.27, height 8.5
HDR2.54-LI-7P [mm] "排针，8脚"
  rect 1.7x1.7 hole 0.9: 1(-7.62,0)
  round 1.7 hole 0.9: 2(-5.08,0) 3(-2.54,0) 4(0,0) 5(2.54,0) 6(5.08,0) 7(7.62,0)
  silkscreen extent -8.89,-1.27 8.89,1.27, body extent -8.89,-1.27 8.89,1.27, height 8.5
HLK-RM65 [mm]
  round 6.2 hole 4.2: 0(-19.892,75.848) 0(-19.892,5.348) 0(33.108,75.848) 0(33.108,5.348)
  rect 0.5x2 smd paste+0 mask+0.05: 1(30.208,-3.97) 2(30.208,0.43) 3(29.408,-3.97) 4(29.408,0.43) 5(28.608,-3.97) 6(28.608,0.43) 7(27.808,-3.97) 8(27.808,0.43) 9(27.008,-3.97) 10(27.008,0.43) 11(26.208,-3.97) 12(26.208,0.43) 13(25.408,-3.97) 14(25.408,0.43) 15(24.608,-3.97) 16(24.608,0.43) 17(23.808,-3.97) 18(23.808,0.43) 19(23.008,-3.97) 20(23.008,0.43) 21(22.208,-3.97) 22(22.208,0.43) 23(21.408,-3.97) 24(21.408,0.43) 25(20.608,-3.97) 26(20.608,0.43) 27(19.808,-3.97) 28(19.808,0.43) 29(19.008,-3.97) 30(19.008,0.43) 31(18.208,-3.97) 32(18.208,0.43) 33(17.408,-3.97) 34(17.408,0.43) 35(16.608,-3.97) 36(16.608,0.43) 37(15.808,-3.97) 38(15.808,0.43) 39(15.008,-3.97) 40(15.008,0.43) 41(14.208,-3.97) 42(14.208,0.43) 43(13.408,-3.97) 44(13.408,0.43) 45(12.608,-3.97) 46(12.608,0.43) 47(11.808,-3.97) 48(11.808,0.43) 49(11.008,-3.97) 50(11.008,0.43) 51(10.208,-3.97) 52(10.208,0.43) 53(9.408,-3.97) 54(9.408,0.43) 55(8.608,-3.97) 56(8.608,0.43) 57(7.808,-3.97) 58(7.808,0.43) 59(7.008,-3.97) 60(7.008,0.43) 61(6.208,-3.97) 62(6.208,0.43) 63(5.408,-3.97) 64(5.408,0.43) 65(4.608,-3.97) 66(4.608,0.43) 67(3.808,-3.97) 68(3.808,0.43) 69(3.008,-3.97) 70(3.008,0.43) 71(2.208,-3.97) 72(2.208,0.43) 73(1.408,-3.97) 74(1.408,0.43) 75(0.608,-3.97) 76(0.608,0.43) 77(-0.192,-3.97) 78(-0.192,0.43) 79(-0.992,-3.97) 80(-0.992,0.43) 81(-1.792,-3.97) 82(-1.792,0.43) 83(-2.592,-3.97) 84(-2.592,0.43) 85(-3.392,-3.97) 86(-3.392,0.43) 87(-4.192,-3.97) 88(-4.192,0.43) 89(-4.992,-3.97) 90(-4.992,0.43) 91(-5.792,-3.97) 92(-5.792,0.43) 93(-6.592,-3.97) 94(-6.592,0.43) 95(-7.392,-3.97) 96(-7.392,0.43) 97(-8.192,-3.97) 98(-8.192,0.43) 99(-8.992,-3.97) 100(-8.992,0.43) 101(-9.792,-3.97) 102(-9.792,0.43) 103(-10.592,-3.97) 104(-10.592,0.43) 105(-11.392,-3.97) 106(-11.392,0.43) 107(-12.192,-3.97) 108(-12.192,0.43) 109(-12.992,-3.97) 110(-12.992,0.43) 111(-13.792,-3.97) 112(-13.792,0.43) 113(-14.592,-3.97) 114(-14.592,0.43) 115(-15.392,-3.97) 116(-15.392,0.43) 117(-16.192,-3.97) 118(-16.192,0.43) 119(-16.992,-3.97) 120(-16.992,0.43)
  round 1.3 hole 1.3 mask+0.051: E(-19.492,-1.773)
  round 0.9 hole 0.9 mask+0.051: E(32.708,-1.773)
  silkscreen extent -25.59,-12.85 38.81,81.55
"L 4*4" [mm]
  rect 2x3 smd: 1(-1.651,0) 2(1.651,0)
  silkscreen extent -2.16,-2.03 2.16,2.03, body extent -2,-2 2,2, height 3.1
"L 6*6" [mm] "叠层电感"
  rect 2.8x3.7 smd: 1(-3,0) 2(3,0)
  silkscreen extent -3.5,-3.3 3.5,3.3, body extent -3,-3 3,3, height 2.1
"L 0603" [mil] "小功率贴片电感"
  rect 35x35 smd: 1(-35,0) 2(35,0)
  silkscreen extent -65,-25 65,25, body extent -31,-16 31,16, height 31
"LED 3MM-G" [mm] "绿色3mm直插LED"
  rect 1.7x1.7 hole 0.9: 1(-1.27,0)
  round 1.7 hole 0.9: 2(1.27,0)
  silkscreen extent -2.01,-2 1.72,1.98, body extent -1.95,-1.95 1.64,1.95, height 5.55
"LED 3MM-R" [mm] "红色3mm直插LED"
  rect 1.7x1.7 hole 0.9: 1(-1.27,0)
  round 1.7 hole 0.9: 2(1.27,0)
  silkscreen extent -2.01,-2 1.72,1.98, body extent -1.95,-1.95 1.64,1.95, height 5.55
"LED 3MM-Y" [mm] "黄色3mm直插LED"
  rect 1.7x1.7 hole 0.9: 1(-1.27,0)
  round 1.7 hole 0.9: 2(1.27,0)
  silkscreen extent -2.01,-2 1.72,1.98, body extent -1.95,-1.95 1.64,1.95, height 5.55
"LED 0603G-L" [mil]
  rect 28x32 smd: 1(-25.59,0) 2(25.59,0)
  silkscreen extent -75,-25 52,25, body extent -31,-16 32,16, height 18
"M3 125X200" [mm] "M3螺丝孔，孔125Mil，焊盘200Mil"
  round 5.08 hole 3.175: 1(0,0)
MSOP10_L [mm] "塑封体长3mm，宽3mm，脚距0.5"
  rect 0.25x1.2 smd: 1(-1,-2.45)
  oval 0.25x1.2 smd: 2(-0.5,-2.45) 3(0,-2.45) 4(0.5,-2.45) 5(1,-2.45) 6(1,2.45) 7(0.5,2.45) 8(0,2.45) 9(-0.5,2.45) 10(-1,2.45)
  silkscreen extent -2.07,-2.6 1.3,1.3, body extent -1.5,-2.45 1.5,2.45, height 0.95
R0603 [mil] "1/10W贴片电阻"
  rect 30x30 smd: 1(-25.59,0) 2(25.59,0)
  silkscreen extent -51,-26 51,26, body extent -31,-16 32,16, height 16
"R 0402_L" [mm] "1/16W贴片电阻"
  rect 0.5x0.5 smd: 1(-0.431,0.004) 2(0.469,0.004)
  silkscreen extent -0.8,-0.45 0.85,0.45, body extent -0.5,-0.25 0.5,0.25, height 0.3
"R 0402_l" [mm] "1/16W贴片电阻"
  rect 0.5x0.5 smd: 1(-0.431,0.004) 2(0.469,0.004)
  silkscreen extent -0.8,-0.45 0.85,0.45, body extent -0.5,-0.25 0.5,0.25, height 0.3
"R 0603_L" [mil] "1/10W贴片电阻"
  rect 30x30 smd: 1(-25.59,0) 2(25.59,0)
  silkscreen extent -51,-26 51,26, body extent -31,-16 32,16, height 16
"R 1206_L" [mil] "1/4W贴片电阻"
  rect 55x62 smd: 1(-55.12,0) 2(57.09,0)
  silkscreen extent -96,-44 98,44, body extent -63,-31 63,32, height 22
RJ45_网口不带灯X1 [mm] "千兆网口"
  round 2.4 hole 1.7: 0(-7.94,-6.73) 0(7.94,-6.73)
  rect 1.524x1.524 hole 0.95: 1(-4.445,4.19)
  round 1.524 hole 0.95: 2(-3.175,6.73) 3(-1.905,4.19) 4(-0.635,6.73) 5(0.635,4.19) 6(1.905,6.73) 7(3.175,4.19) 8(4.445,6.73)
  round 3.3 hole 3.3 unplated: ""(-5.715,-2.16) ""(5.715,-2.16)
  silkscreen extent -7.94,-12.86 7.94,8.54
RJ45_网口不带灯X4 [mm] "千兆网口"
  round 1.5 hole 0.9: A1(-25.4,3.515) A2(-24.13,6.055) A3(-22.86,3.515) A4(-21.59,6.055) A5(-20.32,3.515) A6(-19.05,6.055) A7(-17.78,3.515) A8(-16.51,6.055) B1(-11.43,3.515) B2(-10.16,6.055) B3(-8.89,3.515) B4(-7.62,6.055) B5(-6.35,3.515) B6(-5.08,6.055) B7(-3.81,3.515) B8(-2.54,6.055) C1(2.54,3.515) C2(3.81,6.055) C3(5.08,3.515) C4(6.35,6.055) C5(7.62,3.515) C6(8.89,6.055) C7(10.16,3.515) C8(11.43,6.055) D1(16.51,3.515) D2(17.78,6.055) D3(19.05,3.515) D4(20.32,6.055) D5(21.59,3.515) D6(22.86,6.055) D7(24.13,3.515) D8(25.4,6.055)
  round 2.6 hole 1.6: EH(-29.405,-7.405) EH(-14,7.405) EH(0,7.405) EH(13.97,7.405) EH(29.405,-7.405)
  round 3.25 hole 3.25 unplated: ""(-26.67,-2.835) ""(26.67,-2.835)
  silkscreen extent -29.45,-13.64 29.45,7.51
SMA [mm]
  rect 2.5x1.778 smd: 1(-2.193,-0.006) 2(2.193,0.006)
  silkscreen extent -2.65,-1.52 2.45,1.53, body extent -2.74,-1.4 2.74,1.4, height 2.3
SMB [mm] "4.7*3.9*2.2mm(长宽高，不包括引脚）"
  rect 2.5x2.2 smd: 1(-2.35,0) 2(2.35,0)
  silkscreen extent -2.8,-1.9 3.57,1.9, body extent -2.63,-1.8 2.67,1.8, height 2.35
SMD_4P [mm] "共模电感"
  rect 0.75x0.4 smd: 1(-0.925,0.4) 2(-0.925,-0.4) 3(0.925,-0.4) 4(0.925,0.4)
  silkscreen extent -1,-0.85 1,0.85
SMD_4P_2.1X2.1 [mm] "共模电感"
  rect 0.75x0.4 smd: 1(-0.925,0.4) 2(-0.925,-0.4) 3(0.925,-0.4) 4(0.925,0.4)
  silkscreen extent -1,-0.85 1,0.85
SOT23-6N [mm] "3x1.6x1.1mm(长宽高)"
  rect 0.5x1.2 smd: 1(-0.95,-1.4) 2(0,-1.4) 3(0.95,-1.4) 4(0.95,1.4) 5(0,1.4) 6(-0.95,1.4)
  silkscreen extent -1.78,-1.78 1.55,0.51, body extent -1.5,-1.4 1.5,1.4, height 1.15
SOT223_L [mm] "6.4x7x1.6mm(长宽高)"
  rect 0.75x1.7 smd: 1(-2.3,-3.048) 2(0,-3.048) 3(2.3,-3.048)
  rect 3.1x1.7 smd: 2(0,3.048)
  silkscreen extent -3.5,-3.88 3.25,1.75, body extent -3.25,-3.51 3.25,3.51, height 1.65
"TEST 1.6" [mm] "测试点1.6mm"
  round 1.6 smd paste-1.6: 1(0,0)
  silkscreen extent -1.02,-1.01 1.02,1.02
TRANSFORMER/48P/SMD/GS5014LF [mm] "千兆隔离变压器，贴片"
  rect 0.64x1.7 smd: 1(-11.73,-7.1) 2(-10.71,-7.1) 3(-9.69,-7.1) 4(-8.67,-7.1) 5(-7.65,-7.1) 6(-6.63,-7.1) 7(-5.61,-7.1) 8(-4.59,-7.1) 9(-3.57,-7.1) 10(-2.55,-7.1) 11(-1.53,-7.1) 12(-0.51,-7.1) 13(0.51,-7.1) 14(1.53,-7.1) 15(2.55,-7.1) 16(3.57,-7.1) 17(4.59,-7.1) 18(5.61,-7.1) 19(6.63,-7.1) 20(7.65,-7.1) 21(8.67,-7.1) 22(9.69,-7.1) 23(10.71,-7.1) 24(11.73,-7.1) 25(11.73,7.1) 26(10.71,7.1) 27(9.69,7.1) 28(8.67,7.1) 29(7.65,7.1) 30(6.63,7.1) 31(5.61,7.1) 32(4.59,7.1) 33(3.57,7.1) 34(2.55,7.1) 35(1.53,7.1) 36(0.51,7.1) 37(-0.51,7.1) 38(-1.53,7.1) 39(-2.55,7.1) 40(-3.57,7.1) 41(-4.59,7.1) 42(-5.61,7.1) 43(-6.63,7.1) 44(-7.65,7.1) 45(-8.67,7.1) 46(-9.69,7.1) 47(-10.71,7.1) 48(-11.73,7.1)
  silkscreen extent -14.69,-6.83 14,6.1
"TSW DIP-4.5*4.5*3_V" [mil] "三脚侧插"
  round 60 hole 31.5: 0(-0.01,-37.4) 1(-59.06,37.4) 2(59.06,37.4)
  silkscreen extent -89,-90 89,77
USB3.0-9P-DIP [mm]
  round 1.25 hole 0.75: 1(-3.5,0.25) 2(-1,0.25) 3(1,0.25) 4(3.5,0.25) 5(4,1.75) 6(2,1.75) 7(0,1.75) 8(-2,1.75) 9(-4,1.75)
  round 3 hole 2.3: 10(-6.57,-1.75) 11(6.57,-1.75)
  silkscreen extent -7.35,-13.53 7.35,3.07
USB-A/S_E [mm] "A型直插母头，"
  rect 1.8x1.8 hole 1: 1(-18.56,0)
  round 1.8 hole 1: 2(-16.56,0) 3(-14.56,0) 4(-12.56,0)
  round 2.5 hole 1.35: G(-19.167,-2.718) G(-19.141,2.718) G(-12.167,-2.718) G(-12.141,2.718)
  silkscreen extent -20.03,-2.88 -0.51,2.88, body extent -19.72,-3.61 -0.47,3.64, height 14.45
USB-C-16PIN-1 [mm]
  oval 1x2.099 hole 0.6 slot 1.7 at 90 deg: 1(0.034,0.061) 2(8.674,0.061)
  oval 1x1.799 hole 0.6 slot 1.4 at 90 deg: 3(0.034,-4.088) 4(8.674,-4.088)
  rect 0.6x1.35 smd: A1B12(1.154,0.736) A4B9(1.954,0.736) B1A12(7.554,0.736) B4A9(6.754,0.736)
  rect 0.3x1.35 smd: A5(3.104,0.736) A6(4.104,0.736) A7(4.604,0.736) A8(2.604,0.736) B5(6.104,0.736) B6(5.104,0.736) B7(3.604,0.736) B8(5.604,0.736)
  round 0.65 hole 0.65 unplated: ""(1.464,-0.438) ""(7.244,-0.438)
  silkscreen extent 0.04,-6.81 8.67,1.45, body extent -0.15,-6.75 8.79,0.83, height 3.25
XH2.54-LI-2P [mm] "接插件，2P"
  rect 1.7x1.7 hole 0.9: 1(-1.27,0)
  round 1.7 hole 0.9: 2(1.27,0)
  silkscreen extent -3.81,-3.51 3.74,2.37, body extent -3.77,-3.3 3.77,2.4, height 7.05

## Part data
C1 C5 C7 C10 C11 C13 C15 C16 C17 C19 C20 C21 C22 C25 C28: library part Cap, "Capacitor", 物料名称=贴片电容, 物料编码=3.01.04.0056
C2 C4 C6 C8 C12 C14 C18 C23 C24: library part Cap, "Capacitor", Manufacturer="Generic Components", Class=Passive, Published=08/06/2000, Publisher="Altium Hobart Technology Centre", SubClass=Capacitor
C3: library part "Cap Pol1", "Polarized Capacitor (Radial)", LatestRevisionDate=17-Jul-2002, LatestRevisionNote="Re-released for DXP Platform.", PackageReference=RB7.6-15, Published=8-Jun-2000, Publisher="Altium Limited"
C9 C26 C30 C32 C33: library part CAP, "Capacitor"
C34 C60: library part "CAP NP_Dup1", "Cap, HighVolt, SMD 1206, 2KV", Manufacturer=Arcotromics, Package=DIP, Package_Type=床杆, BOM_Class=RJ45, By=Ralink, Class=0C-HighVolt, Distributor=窲瓣悔, Distributor_FAX=02-2999-6614, Distributor_Mobile=0933-153488, Distributor_Name=羘縈, Distributor_Name2=Alven, Distributor_TEL="02-2999-6599 #163", HYP_Type=(C, Key=3162U-N14-V11-#409, Price=0.66, Price_USD=0.02
C35 C36 C37 C38 C39 C41 C42 C43 C44 C45 C46 C47 C48 C49 C50 C51 C52 C53 C54 C55 C56 C57 C58 C59: library part 0.1UF/25V_+80%-20%_CC_S0603, "Cap, MLCC, 0402, Y5V, 16V", Manufacturer=地穝, Package=SMD, Package_Type=Reel, Part Number=100-110-03400, BOM_Class=RJ45, By=Ralink, Class=0C-0402, Distributor=瓁穨, Distributor_FAX=02-2917-3336~7, Distributor_Mobile=0939-969-849, Distributor_Name=糂╭, Distributor_TEL=02-2917-3334, HYP_Type=(C, Key=3162U-N14-V11-#478, P/N=26-400-311104, V1="25V +80% -20%"
C40: library part C, "无极性贴片电容", BOM名称=无极性贴片电容, 学习资源=www.ooocke.com, 版权归属=源创客
CMK1 CMK2 CMK3 CMK4: library part CMK1
D1 D3: library part Diode, "Default Diode", PackageDocument=Sep-1996, Code_JEDEC=DO-214-AB, LatestRevisionDate=17-Jul-2002, LatestRevisionNote="Re-released for DXP Platform.", PackageReference=SMC, Published=8-Jun-2000, Publisher="Altium Limited"
D2: library part TVS
D4 D5 D6 D8 D9 D10 D11 D13 D14 D15: library part LED0, "贴片发光二极管", LatestRevisionDate=08-Jul-2005, LatestRevisionNote="Mech Layer 1 removed.", PackageDescription="LED; 2 Leads", PackageReference=LED-0, Published=8-Jun-2000, Publisher="Altium Limited"
D7 D12 D17 D18 D19 D20 D21 D22: library part "Diode BAS70", "Silicon AF Schottky Diode for High-Speed Switching", PackageDocument=Sep-2001, ComponentLink1Description="Manufacturer Link", ComponentLink1URL=http://www.infineon.com/, ComponentLink2Description=Datasheet, ComponentLink2URL=http://www.infineon.com/upload/Document/cmc_upload/documents/009/382/bas40_bas140series_1.pdf, DatasheetDocument=Oct-1999, Note="Pin 2 is not connected and not drawn.", PackageReference=SOT-23, Published=21-Mar-2003, Publisher="Altium Limited"
F1 F2 F3: library part "Fuse 1", "Fuse", LatestRevisionDate=17-Jul-2002, LatestRevisionNote="Re-released for DXP Platform.", PackageReference=PIN-W2/E2.8, Published=8-Jun-2000, Publisher="Altium Limited"
FB1 FB2: library part INDUCTOR, MFR_Name=MURATA, MFR_PN=BLM15PX121SZ1D
J1: "Low Voltage Power Supply Connector", ComponentLink1Description="Manufacturer Link", ComponentLink1URL=http://domino.kycon.com/internet/Products.html, DatasheetDocument=09-May-2002, Published=17-Dec-2003, Publisher="Altium Limited"
J5 J6 J7 J8: "铜柱孔", BOM名称=铜柱孔, 学习资源=www.ooocke.com, 版权归属=源创客
JP1: library part "Header 3", "3P接插件", BOM名称=3P接插件, 学习资源=www.ooocke.com, 版权归属=源创客
JP2: library part "Header 7", "7P接插件", BOM名称=7P接插件, 学习资源=www.ooocke.com, 版权归属=源创客
JP3 JP4: library part "Header 6", "6P接插件", BOM名称=6P接插件, 学习资源=www.ooocke.com, 版权归属=源创客
JP5 JP6 JP7 JP8 JP9: library part "Header 2", "2P接插件", BOM名称=2P接插件, 学习资源=www.ooocke.com, 版权归属=源创客
L1 L4: library part LineInductors
LED1 LED2 LED3: "贴片LED", BOM名称=贴片LED, 学习资源=www.ooocke.com, 版权归属=源创客
R1 R2 R3 R4 R5 R6 R7 R8 R9 R10 R11 R12 R13 R14 R15 R17 R18 R20 R21 R22 R23 R24 R25 R26 R27 R28 R31 R32 R33 R34 R35 R36 R37 R44 R63 R64 R65 R66 R67 R68 R69 R70 R71 R72 R73 R74 R75 R76 R77 R78 R79 R80 R81 R82 R83 R84 R85 R86 R87 R88 R89 R90 R91 R92 R93 R94 R95 R96 R97 R98 R99 R100: library part R, "贴片电阻", BOM名称=贴片电阻, 学习资源=www.ooocke.com, 版权归属=源创客
R16 R19 R29 R30: library part RES2
R38 R39 R40 R41 R42 R43 R45 R46: library part R75_1%_S0603, "Resistor, 0402, 5%", Manufacturer=驾м, Package=SMD, Package_Type=Reel, Part Number=110-110-03300, BOM_Class=RJ45, By=Ralink, Class=1R-0402, Distributor=驾м, Distributor_FAX="03-3245183 ,3247410", Distributor_Mobile=NA, Distributor_Name=法睶骸, Distributor_Name2="Cherry Yang", Distributor_TEL="03-3246169 #2221", HYP_Type=(R, Key=3162U-N14-V11-#345, P/N=21-201-627501, Price=0.0099, Price_USD=0.0003, SDTSourceLibName=C:\WINDOWS\TEMP\DEVICE1.LIB, V1="1% 1/16W"
R47 R48 R49 R50 R51 R52 R53 R54 R55 R56 R57 R58 R59 R60 R61 R62: library part R75_1%_S0603, "Resistor, SMD 0402, 5%", Manufacturer=驾м, Package=SMD, Package_Type=Reel, Part Number=110-110-03300, BOM_Class=RJ45, By=Ralink, Class=1R-0402, Distributor=驾м, Distributor_FAX="03-3245183 ,3247410", Distributor_Mobile=NA, Distributor_Name=法睶骸, Distributor_Name2="Cherry Yang", Distributor_TEL="03-3246169 #2221", HYP_Type=(R, Key=3162U-N14-V11-#345, P/N=21-201-627501, SDTSourceLibName=C:\WINDOWS\TEMP\SCH.LIB, V1="5% 1/4W"
RJ1 RJ2: library part RJ45X1_4, Manufacturer=救┹, Manufacturer's Part Number=PJ-A1-BXBH-FDNNN-1, Part Number=214411*12311105
RJ3: BOM_Manufacturer=CONNFLY, BOM_Manufacturer Part=DS1129-02-S80BP, BOM_Supplier=LCSC, BOM_Supplier Part=C77852, image=http://image.lceda.cn/szlcsc/C77852.jpg, spicePre=R, spiceSymbolName=DS1129-02-S80BP, subpart_no=3
SW1 SW2: library part "TSW DIP-6x6", "直插6x6轻触开关", BOM名称=直插6x6轻触开关, 学习资源=www.ooocke.com, 版权归属=源创客
T1 T2 T3: library part "XMER 2P G2PM109N"
TP4 TP6 TP7 TP10: library part TP
U1: library part SY8105
U2: "串口芯片"
U4: library part SY8201
USB2: library part USB-A/S, "USB-A型母接口", BOM名称=USB-A型母接口, 学习资源=www.ooocke.com, 版权归属=源创客
V1: library part AMS1117, "三端稳压芯片", BOM名称=稳压芯片, 学习资源=www.ooocke.com, 版权归属=源创客

## Via types
v1: diameter 0.5, hole 0.3, Top Layer to Bottom Layer, tented both sides, 829 vias

## Nets (pads, with @x,y where several pads share a name; then routed paths per layer and width w, separated by ;. In a path a pad name is that pad's centre, name@x,y a point inside that pad or via, vN(x,y) a via of type N, cw(c..) or ccw(c..) an arc to the next point about the centre after c; other vN are vias at no path point)
1.8VDD: C56.2 C57.2 C58.2 C59.2 R63.1 R96.2 T3.13 T3.16 T3.19 T3.22 | length 82.9
  Top Layer w0.181: R63.1@155.873,75.305 155.877,75.302 155.877,74.539 v1(155.881,74.535) ; v1(184.15,42.799) 184.164,42.785 184.164,42.228 C59.2@184.178,42.214 186.852,42.214 T3.22@186.887,42.179 ; v1(184.15,47.65) 184.164,47.665 184.164,48.31 C57.2@184.178,48.325 186.862,48.325 T3.16@186.887,48.299 ; v1(184.15,50.775) 184.164,50.789 184.164,51.366 C56.2@184.178,51.38 186.867,51.38 T3.13@186.887,51.359 ; v1(184.175,44.628) 184.177,44.629 184.177,45.268 C58.2@184.178,45.269 186.857,45.269 T3.19@186.887,45.239
  Top Layer w0.2: R96.2@139.788,68.66 139.808,68.68 139.808,69.729 v1(139.827,69.748) ; v1(160.856,66.125) v1@167.262,59.718
  Bottom Layer w0.181: v1(167.259,59.715) 170.866,56.109 171.044,56.109 171.068,56.084 179.155,56.084 184.089,51.15 184.089,50.836 v1(184.15,50.775) v1(184.15,47.65) v1(184.15,42.799)
  Bottom Layer w0.2: v1(139.827,69.748) 139.827,71.933 142.429,74.535 v1(155.881,74.535) ; v1(155.881,74.535) 155.88,71.101 v1(160.856,66.125)
3V3_USB: C7.2 C11.2 C14.2 C16.1 JP8.1 R98.2 U2.7 U2.10 V1.2 | length 32.6
  Top Layer w0.2: C7.2@87.982,49.186 87.595,48.799 U2.10@87.595,47.484 87.595,45.196 88.24,44.552 R98.2@92.304,44.552 ; C11.2@88.909,49.286 C11.2@89.005,49.19 89.086,49.11 89.086,47.494 U2.7@89.095,47.484
  Top Layer w0.8: JP8.1@76.556,57.099 80.563,57.099 81.431,56.232 V1.2@82.819,56.232 V1.2@88.915,56.232 C16.1@88.915,50.937 ; C7.2@87.982,49.186 88.808,49.186 88.909,49.286 C14.2@88.909,51.896
5V_USB: C12.2 C13.1 JP9.1 R91.1 USB1.A4B9 USB1.B4A9 V1.3 | length 24.7
  Top Layer w0.4: 80.188,44.374 80.934,45.12 81.663,45.12 USB1.A4B9@81.763,45.22 ; 80.442,41.072 80.735,40.778 80.735,40.774 80.989,40.52 81.663,40.52 USB1.B4A9@81.763,40.42
  Top Layer w0.5: 80.188,44.374 80.188,41.326 80.442,41.072 ; USB1.A4B9@81.772,45.211 83.19,45.211
  Top Layer w0.8: JP9.1@76.556,52.019 78.96,52.019 80.873,53.932 V1.3@82.819,53.932 82.819,50.745 83.718,49.845 83.718,45.739 83.19,45.211
+4.5V~18V: D1.1 D2.2 F2.2
+5V: C23.2 C24.2 C25.1 D3.1 JP6.1 L4.2 R10.1 R91.2 R95.2 TP7.1 | length 116.8
  Top Layer w0.2: 139.499,41.631 142.596,41.631 R95.2@142.621,41.656 ; 139.814,50.518 140.119,50.518 ; 140.126,50.525 140.304,50.346 140.304,46.74 140.814,46.229 R10.1@141.963,46.229 ; 140.138,50.545 140.138,50.85
  Top Layer w0.5: D3.1@136.559,52.665 137.118,53.224 ; 138.811,50.089 139.37,49.53 ; 139.37,50.089 139.499,50.218 139.929,50.648
  Top Layer w1: R91.2@84.988,48.768 v1@84.988,50.571 ; v1(136.576,32.168) 138.016,32.168 139.499,33.65 139.499,41.631 139.499,50.218 139.499,50.312
  Bottom Layer w1: v1(85.065,49.972) v1(85.065,50.571) 94.463,59.969 103.175,59.969 105.842,57.302 105.842,38.379 112.053,32.168 v1(136.576,32.168) v1@137.79,32.168 ; 105.842,57.265 JP6.1@108.41,57.265 ; 106.053,56.676 106.477,57.099
  other v1: 137.197,32.167 137.79,32.191
CH_DM: U2.2 USB1.A7 USB1.B7 | length 11.4
  Top Layer w0.2: USB1.B7@81.763,43.57 81.771,43.578 83.027,43.578 v1(83.035,43.586) ; v1(83.058,42.568) 83.057,42.569 81.764,42.569 USB1.A7@81.763,42.57 85.074,42.57 86.055,41.589 86.055,41.58 86.281,41.354 87.605,41.354 88.095,41.845 U2.2@88.095,42.584
  Bottom Layer w0.2: v1(83.035,43.586) 83.046,43.575 83.046,42.58 v1(83.058,42.568)
CH_DP: U2.1 USB1.A6 USB1.B6 | length 9.7
  Top Layer w0.2: USB1.B6@81.763,42.07 81.713,42.12 81.031,42.12 80.835,42.316 80.835,42.825 81.031,43.02 81.713,43.02 USB1.A6@81.763,43.07 85.073,43.07 86.436,41.707 87.428,41.707 87.575,41.855 87.575,42.564 U2.1@87.595,42.584
ESW_P1_LED: D5.2 R7.1 | length 19.4
  Top Layer w0.2: R7.1@128.909,117.093 128.909,123.909 132.265,127.265 137.905,127.265 D5.2@139.487,128.847
ESW_P2_LED: D6.2 R8.1 | length 14.1
  Top Layer w0.2: R8.1@127.892,117.093 127.892,123.417 D6.2@133.323,128.847
  Bottom Layer w0.2: D6.2@133.323,128.722 D6.2@133.323,128.847
ESW_P3_LED: D8.2 R11.1 | length 12.1
  Top Layer w0.2: R11.1@126.875,117.093 126.875,128.564 D8.2@127.158,128.847
  Bottom Layer w0.2: D8.2@127.008,128.698 D8.2@127.158,128.847
ESW_P4_LED_0: D9.2 R14.1 | length 13.8
  Top Layer w0.2: D9.2@120.925,128.847 120.925,128.622 125.858,123.69 R14.1@125.858,117.093
ESW_P5_LED_0: D10.2 R15.1 | length 19
  Top Layer w0.2: D10.2@114.761,128.847 116.571,127.037 121.85,127.037 124.841,124.046 R15.1@124.841,117.093
ESW_TXVN_A_P0: J2.111 R70.1 T3.23 | length 45
  Top Layer w0.188: J2.111@164.357,72.623 165.107,72.623 165.344,72.386 166.189,72.386 172.483,66.092 172.483,50.528 179.308,43.703 182.189,40.822 186.02,40.822 186.357,41.159 T3.23@186.887,41.159
ESW_TXVN_A_P1: J2.93 T3.11 | length 39.9
  Top Layer w0.188: J2.93@164.357,79.823 165.107,79.823 165.344,79.586 167.294,79.586 178.391,68.49 178.391,58.022 183.347,53.066 186.024,53.066 186.357,53.399 T3.11@186.887,53.399
ESW_TXVN_A_P2: J2.75 T2.23 | length 29.1
  Top Layer w0.188: J2.75@164.357,87.023 165.107,87.023 165.327,86.803 167.95,86.803 183.132,71.622 186.021,71.622 186.131,71.732 186.131,71.748 186.357,71.974 T2.23@186.887,71.974
ESW_TXVN_A_P3: J2.57 T2.11 | length 27
  Top Layer w0.188: J2.57@164.357,94.223 165.107,94.223 165.326,94.004 172.053,94.004 182.182,83.874 186.021,83.874 186.131,83.984 186.131,83.988 186.357,84.214 T2.11@186.887,84.214
ESW_TXVN_A_P4: R88.2 T1.23 | length 8.7
  Top Layer w0.188: R88.2@178.956,101.495 179.261,101.19 183.152,101.19 184.378,102.416 186.021,102.416 186.131,102.526 186.131,102.563 186.357,102.789 T1.23@186.887,102.789
ESW_TXVN_A_P5: R80.2 T1.11 | length 12.8
  Top Layer w0.188: R80.2@175.917,110.705 176.306,110.705 180.286,114.685 186.013,114.685 186.357,115.029 T1.11@186.887,115.029